# Altium PCB centralised_bms.PcbDoc
Units mm, origin at the board's own origin, x right, y up, seen from the top; angles counter-clockwise.
Board outline 152.4 x 101.6 mm, 2 copper layers (Top Layer, Bottom Layer); 15 components, 53 nets, 94 pads, 14 vias.
Unrouted connection lines stored in the file: 3.
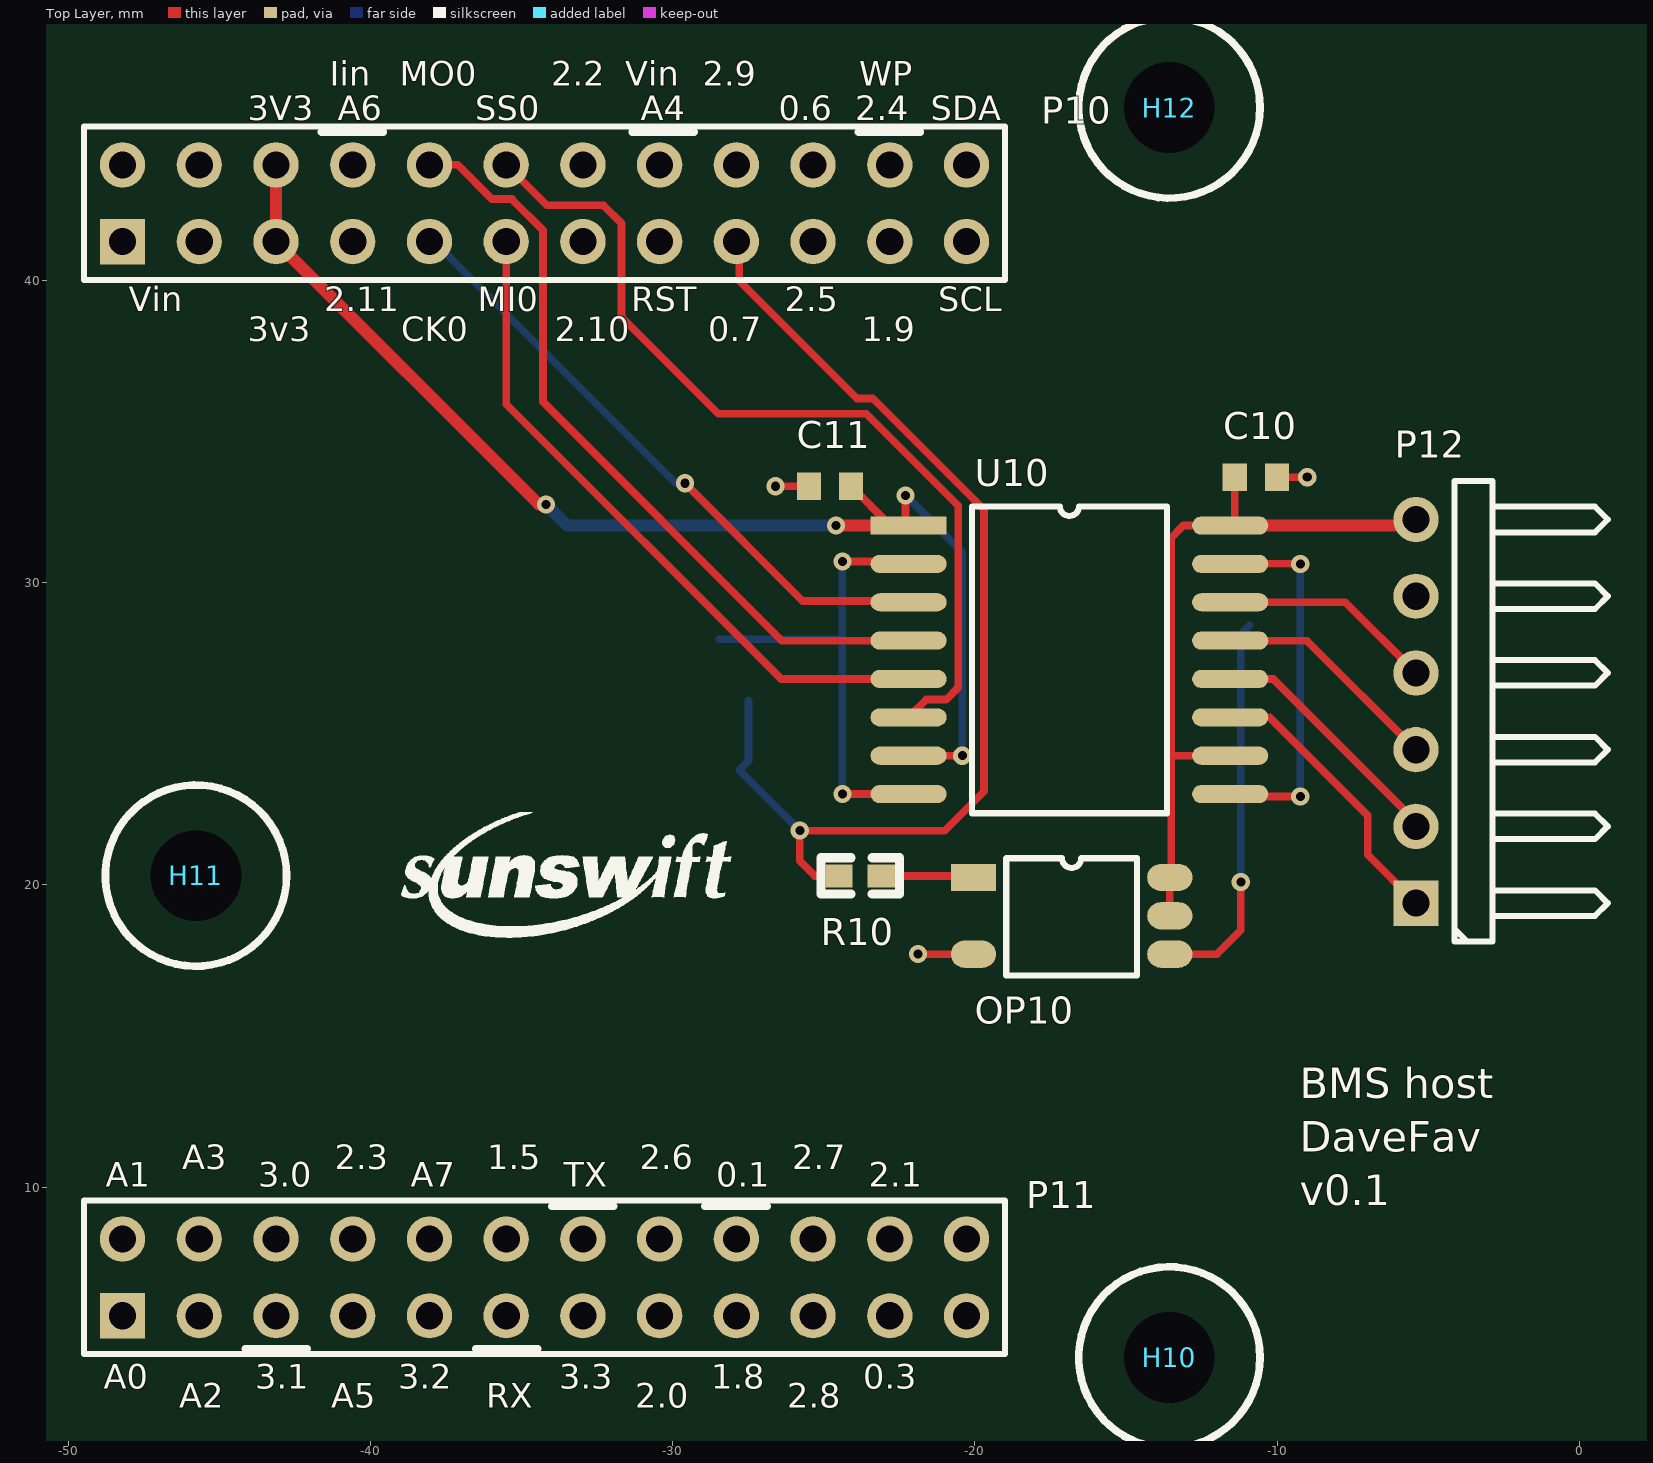
[diagram p0: Top Layer view]
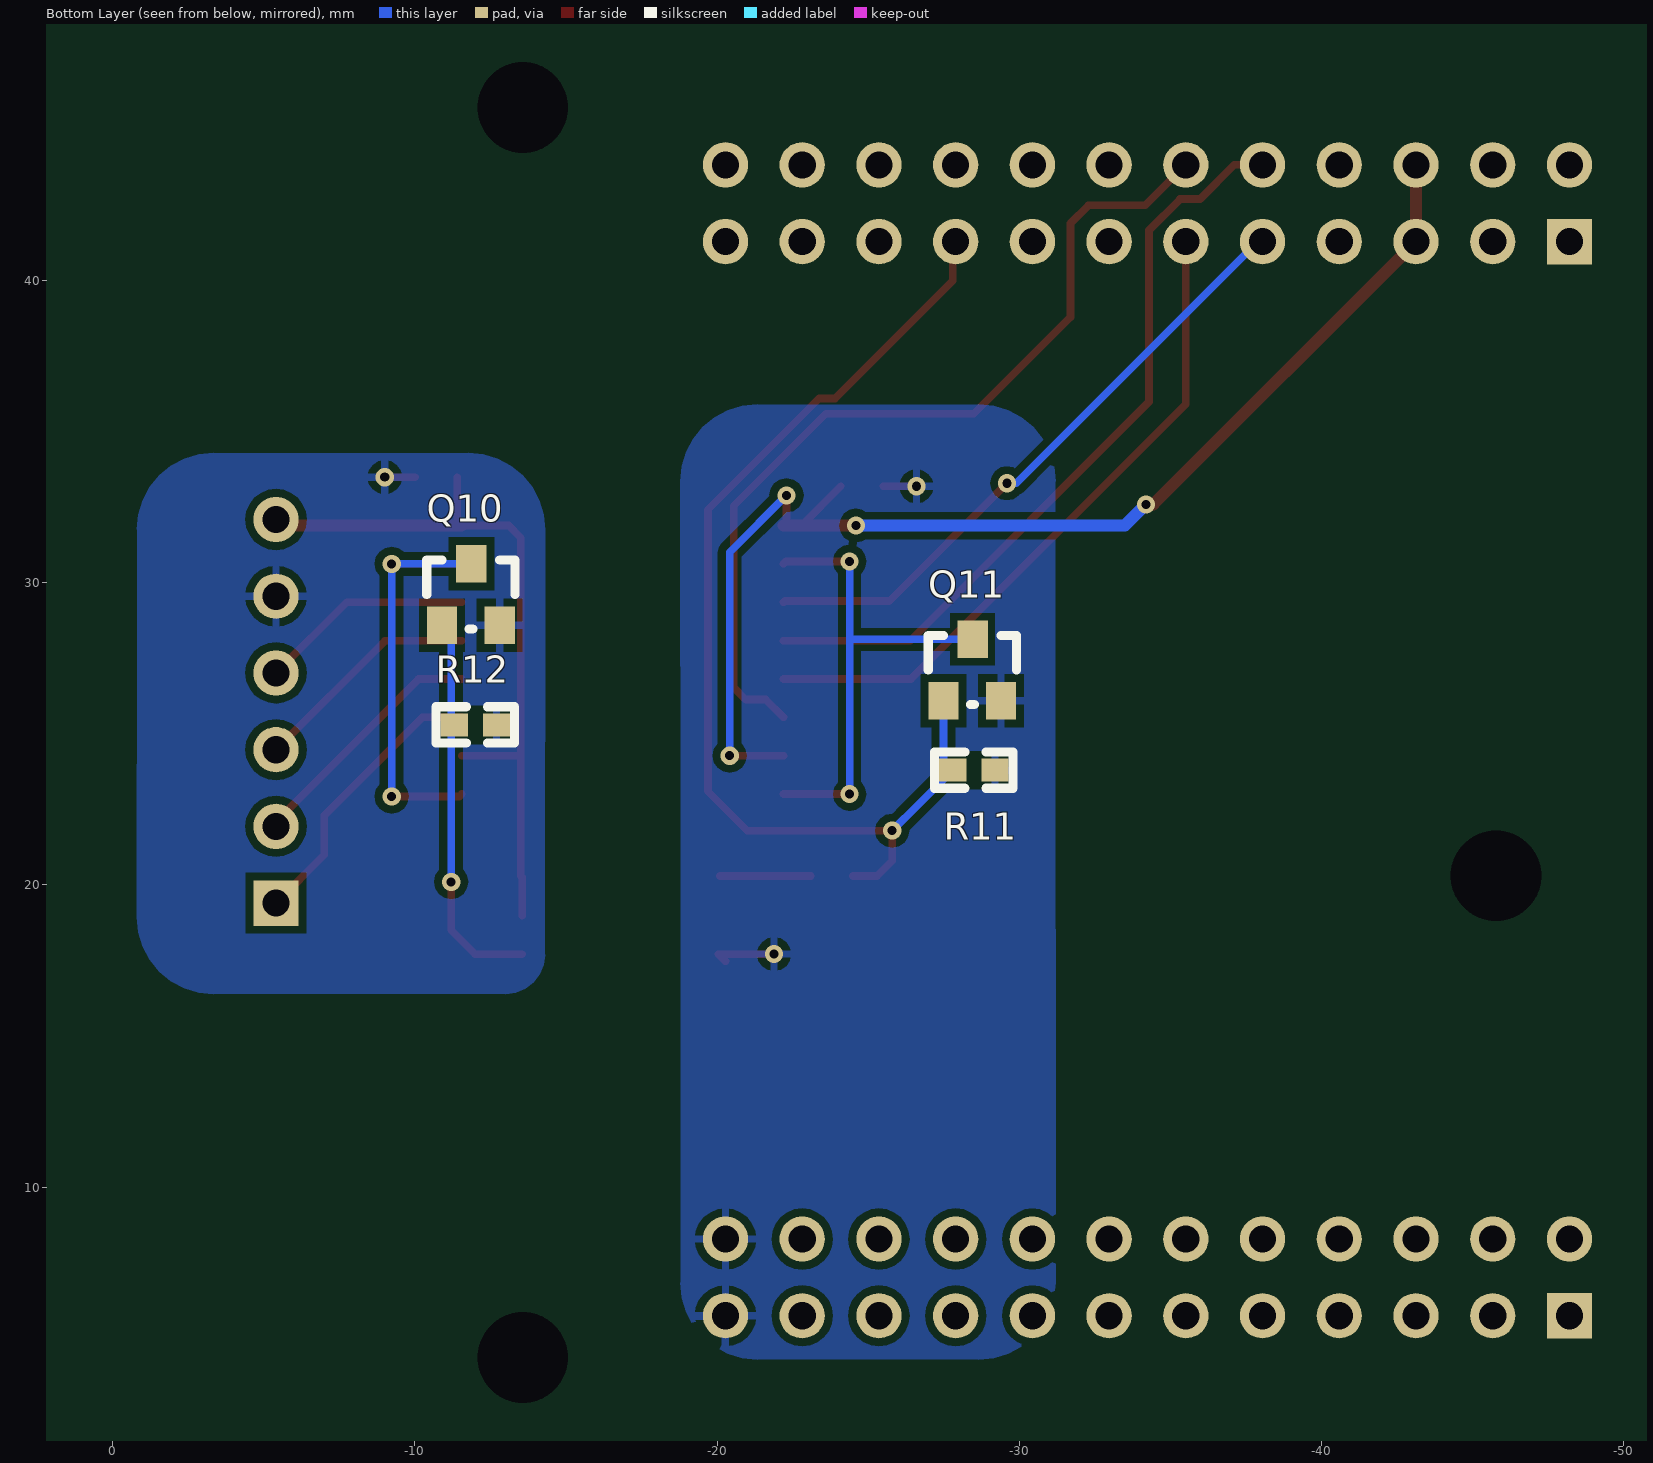
[diagram p1: Bottom Layer view, seen from below]

## Layer stack, top to bottom
Top Layer: signal copper 0.0356
Dielectric: dielectric 0.32, FR-4, Dk 4.8
Bottom Layer: signal copper 0.0356

## Board outline
-132.508,-7.888 19.892,-7.888 19.892,93.712 -132.508,93.712

## Design rules (kind name [scope] priority, off if disabled: settings)
Clearance [All] p1: gap=0.254
PolygonConnect [All] p1: connectstyle=Relief reliefconductorwidth=0.254 reliefentries=4 polygonreliefangle="90 Angle"
RoomDefinition TopLevel [InComponentClass('TopLevel')] p1: confinementstyle=ConfineIn formatcopy=TRUE lockcomponents=FALSE outline 21.092,9.012 76.192,9.012 76.192,27.312 21.092,27.312
RoutingVias [All] p1: holewidth=0.711 width=1.27 viastyle="Through Hole" minholewidth=0.3 minwidth=0.6 maxholewidth=0.711 maxwidth=1.27
SilkscreenOverComponentPads [All] p1: minsilkscreentomaskgap=0.254
SolderMaskExpansion [All] p1: expansion=0.102
Width [All] p1: maxlimit=2 minlimit=0.2 preferedwidth=0.3
27 further rules are at their usual default settings.

## Components (designator, comment, footprint, x,y, rotation, side; value= is the part's Value field where it differs from the comment)
C10 "Cap Semi" 1608[0603] -10.7,33.5 r180 top
C11 "Cap Semi" 1608[0603] -24.8,33.2 r0 top
H10 "HOLE" M2.5 -13.564,4.359 r0 top
H11 "HOLE" M2.5 -45.79,20.309 r0 top
H12 "HOLE" M2.5 -13.564,45.739 r0 top
OP10 "VOM452T" VOM452T -20.8,20.3 r0 top
P10 "Header 12X2A" HDR2X12_CEN -48.22,41.299 r0 top
P11 "Header 12X2A" HDR2X12_CEN -48.22,5.739 r0 top
P12 "Header 6H" HDR1X6H -5.4,19.4 r90 top
Q10 "ZXM61N02F" SOT23-3 -10.9,28.6 r180 bottom
Q11 "ZXM61N02F" SOT23-3 -27.5,26.1 r180 bottom
R10 "Res Semi" 0603 -23.1,20.3 r180 top
R11 "Res Semi" 0603 -29.2,23.8 r0 bottom
R12 "Res Semi" 0603 -12.7,25.3 r0 bottom
U10 "ADUM1401" SOIC_16_wide -22.2,31.9 r0 top

## Footprints (in the part's own frame and the unit in brackets; to place one, negate y for a bottom-side part, rotate by r counter-clockwise, add the part's x,y. Pads: shape width x height; smd on the part's side, far side on the other; paste and mask are expansions set on the pad)
0603 [mil]
  rect 35.43x30 smd: 1(0,0) 2(55,0)
  silkscreen extent -24,-24 79,24
1608[0603] [mm] "Chip Capacitor, Body 1.6x0.8mm, IPC High Density"
  rect 0.8x0.9 smd: 1(-0.7,0) 2(0.7,0)
  body extent -0.87,-0.48 0.87,0.48, height 1.3
HDR1X6H [mm] "Connector; Header; 6 Position; Right Angle"
  rect 1.5x1.5 hole 0.9: 1(0,0)
  round 1.5 hole 0.9: 2(2.54,0) 3(5.08,0) 4(7.62,0) 5(10.16,0) 6(12.7,0)
  silkscreen extent -1.27,-6.35 13.97,-1.27
HDR2X12_CEN [mm] "Connector; Header; 12x2 Position"
  rect 1.5x1.5 hole 0.9: 1(0,0)
  round 1.5 hole 0.9: 2(2.54,0) 3(5.08,0) 4(7.62,0) 5(10.16,0) 6(12.7,0) 7(15.24,0) 8(17.78,0) 9(20.32,0) 10(22.86,0) 11(25.4,0) 12(27.94,0) 13(0,2.54) 14(2.54,2.54) 15(5.08,2.54) 16(7.62,2.54) 17(10.16,2.54) 18(12.7,2.54) 19(15.24,2.54) 20(17.78,2.54) 21(20.32,2.54) 22(22.86,2.54) 23(25.4,2.54) 24(27.94,2.54)
  silkscreen extent -1.27,-1.27 29.21,3.81
M2.5 [mm]
  round 0 hole 3: 1(0,0)
  silkscreen extent -3,-3 3,3
SOIC_16_wide [mm]
  rect 2.52x0.6 smd: 1(0,0)
  oval 2.52x0.6 smd: 2(0,-1.27) 3(0,-2.54) 4(0,-3.81) 5(0,-5.08) 6(0,-6.35) 7(0,-7.62) 8(0,-8.89) 9(10.65,-8.89) 10(10.65,-7.62) 11(10.65,-6.35) 12(10.65,-5.08) 13(10.65,-3.81) 14(10.65,-2.54) 15(10.65,-1.27) 16(10.65,0)
  silkscreen extent 2.09,-9.53 8.55,0.64
SOT23-3 [mm]
  rect 1x1.25 smd: 1(0,0) 2(1.905,0) 3(0.965,2.032)
  silkscreen extent -0.51,-0.13 2.41,2.16
VOM452T [mm]
  rect 1.5x0.9 smd: 1(0.75,-0.05)
  oval 1.5x0.9 smd: 3(0.75,-2.59) 4(7.25,-2.59) 5(7.25,-1.32) 6(7.25,-0.05)
  silkscreen extent 1.84,-3.3 6.16,0.59

## Part data
C10 C11: "Capacitor (Semiconductor SIM Model)"
H10 H11 H12: "Hole"
P10 P11: "Header, 12-Pin, Dual row"
P12: "Header, 6-Pin, Right Angle"
Q10 Q11: "1.7A, 20V N-Channel Enhancement mode FET"
R10 R11 R12: "Semiconductor Resistor"

## Via types
v1: diameter 0.6, hole 0.3, Top Layer to Bottom Layer, 14 vias

## Nets (pads, with @x,y where several pads share a name; then routed paths per layer and width w, separated by ;. In a path a pad name is that pad's centre, name@x,y a point inside that pad or via, vN(x,y) a via of type N, cw(c..) or ccw(c..) an arc to the next point about the centre after c; other vN are vias at no path point)
3V3: C11.2 P10.3 P10.15 U10.1 U10.7 | length 41.4
  Top Layer w0.254: C11.2 U10.1@-22.8,31.9 ; v1(-22.3,32.9) -22.3,32 U10.1 ; U10.7 v1(-20.42,24.28)
  Top Layer w0.4: P10.15 P10.3 -34.441,32.6 v1(-34.2,32.6) ; v1(-24.6,31.9) -22.8,31.9 U10.1
  Bottom Layer w0.254: v1(-22.3,32.9) -20.42,31.02 v1(-20.42,24.28)
  Bottom Layer w0.4: v1(-34.2,32.6) -33.5,31.9 v1(-24.6,31.9)
EEPROM_WP: P10.23
GND: C11.1 OP10.3 P10.13 P10.14 P11.12 P11.24 Q11.2 R11.1 | length 3.3
  Top Layer w0.254: v1(-26.6,33.2) C11.1 ; v1(-21.89,17.71) OP10.3 OP10.3@-20.28,17.48
ISOGND: C10.1 P12.5 Q10.2 R12.1 | length 1
  Top Layer w0.254: C10.1 v1(-9,33.5)
NetOP10_1: OP10.1 R10.1 | length 3
  Top Layer w0.254: R10.1 OP10.1@-20.1,20.3
NetOP10_4: OP10.4 Q10.1 R12.2 | length 12.9
  Top Layer w0.254: OP10.4 -11.99,17.71 -11.2,18.5 v1(-11.2,20.1)
  Bottom Layer w0.254: v1(-11.2,20.1) -11.2,25.3 -11.2,28.3 Q10.1
NetP12_1: P12.1 U10.11 | length 9.5
  Top Layer w0.254: U10.11 -10.25,25.55 -7,22.3 -7,21 P12.1
NetP12_2: P12.2 U10.12 | length 8.3
  Top Layer w0.254: U10.12 -10.12,26.82 -5.4,22.1 P12.2
NetP12_3: P12.3 U10.13 | length 7.6
  Top Layer w0.254: U10.13 -9.01,28.09 P12.3
NetP12_4: P12.4 U10.14 | length 7.1
  Top Layer w0.254: U10.14 -7.74,29.36 P12.4
NetQ10_3: Q10.3 U10.9 U10.15 | length 15
  Top Layer w0.254: U10.9 -11.47,22.93 v1(-9.23,22.93) ; U10.15 v1(-9.23,30.63)
  Bottom Layer w0.254: Q10.3 -9.232,30.632 v1(-9.23,30.63) v1(-9.23,22.93)
NetQ11_3: Q11.3 U10.2 U10.8 | length 16.2
  Top Layer w0.254: v1(-24.39,23.01) U10.8 ; v1(-24.39,30.71) -22.28,30.71 U10.2
  Bottom Layer w0.254: Q11.3 -24.422,28.132 ; v1(-24.39,23.01) v1(-24.39,30.71)
"PIO 0.1/CLKOUT": P11.21
"PIO 0.2/SSEL0": P10.18 U10.6 | length 29.5
  Top Layer w0.254: P10.18 -34.181,42.5 -32.3,42.5 -31.7,41.9 -31.7,38.8 -28.5,35.6 -23.6,35.6 -20.559,32.559 -20.559,26.538 -20.958,26.139 -21.611,26.139 U10.6
"PIO 0.3": P11.11
"PIO 0.4/SCL": P10.12
"PIO 0.5/SDA": P10.24
"PIO 0.6": P10.22
"PIO 0.7": P10.9 Q11.1 R10.2 R11.2 | length 36.9
  Top Layer w0.254: P10.9 -27.8,41.199 -27.8,40 -23.908,36.108 -23.39,36.108 -19.7,32.418 -19.7,23.1 -21,21.8 v1(-25.8,21.8) -25.8,20.8 -25.3,20.3 R10.2
  Bottom Layer w0.254: Q11.1 -27.5,24.103 R11.2 -25.803,21.8 v1(-25.8,21.8) -26.203,22.203
"PIO 0.8/MISO0": P10.6 U10.5 | length 22.5
  Top Layer w0.254: P10.6 -35.52,35.92 -26.42,26.82 U10.5
"PIO 0.9/MOSI0": P10.17 U10.4 | length 25.7
  Top Layer w0.254: P10.17 -37.119,43.839 -35.988,42.708 -35.33,42.708 -34.3,41.679 -34.3,36 -26.39,28.09 U10.4
"PIO 0.10/SCK0": P10.5 U10.3 | length 20.8
  Top Layer w0.254: v1(-29.6,33.3) -25.7,29.4 -22.24,29.4 U10.3
  Bottom Layer w0.254: P10.5 -37.899,41.299 -29.9,33.3 v1(-29.6,33.3)
"PIO 0.11/ADC0": P11.1
"PIO 1.0/ADC1": P11.13
"PIO 1.1/ADC2": P11.2
"PIO 1.2/ADC3": P11.14
"PIO 1.3/ADC4": P10.20
"PIO 1.4/ADC5/WAKEUP": P11.4
"PIO 1.5": P11.18
"PIO 1.6/RX": P11.6
"PIO 1.7/TX": P11.19
"PIO 1.8": P11.9
"PIO 1.9": P10.11
"PIO 1.10/ADC6": P10.16
"PIO 1.11/ADC7": P11.17
"PIO 2.0/SSEL1": P11.8
"PIO 2.1/SCK1": P11.23
"PIO 2.2/MISO1": P10.19
"PIO 2.3/MOSI1": P11.16
"PIO 2.5": P10.10
"PIO 2.6": P11.20
"PIO 2.7": P11.22
"PIO 2.8": P11.10
"PIO 2.9": P10.21
"PIO 2.10": P10.7
"PIO 2.11": P10.4
"PIO 3.0": P11.15
"PIO 3.1": P11.3
"PIO 3.2": P11.5
"PIO 3.3": P11.7
R\E\S\E\T\: P10.8
VIN: P10.1 P10.2
VREG: C10.2 OP10.5 OP10.6 P12.6 U10.10 U10.16 | length 24.5
  Top Layer w0.254: OP10.5 OP10.6 -13.5,20.3 -13.5,24.2 ; U10.10 -13.42,24.28 ccw(c-13.42,24.2) -13.5,24.2 ; C10.2 -11.4,32.05 U10.16 -13.1,31.9 -13.5,31.5 -13.5,24.2 ; -9.1,31.9 -9.063,31.9
  Top Layer w0.4: U10.16 -9.1,31.9 ; -9.063,31.9 P12.6@-5.4,31.9
pads on no net: H10.1 H11.1 H12.1

## Polygon pours and split planes (outlines as drawn)
GND on Bottom Layer "GND_PLANE" (solid, pour order 4): -28,4.3 -23.2,4.3 -22.3,4.3 -21.34,4.3 ccw(c-21.34,6.84) -18.8,6.84 -18.8,21.1 -18.8,33.36 ccw(c-21.34,33.36) -21.34,35.9 -21.9,35.9 -28.66,35.9 ccw(c-28.66,33.36) -31.2,33.36 -31.2,28 -31.2,6.84 ccw(c-28.66,6.84) -28.66,4.3 -27.7,4.3
ISOGND on Bottom Layer "ISOGND_PLANE" (solid, pour order 8): -4.5,16.4 -10.6,16.4 -13,16.4 cw(c-13,17.7) -14.3,17.7 -14.3,31.76 cw(c-11.76,31.76) -11.76,34.3 -8.4,34.3 -3.34,34.3 cw(c-3.34,31.76) -0.8,31.76 -0.8,29.1 -0.8,18.94 cw(c-3.34,18.94) -3.34,16.4 -4.5,16.4

## Silkscreen, mask and mechanical layers (free items; w line width, h text height)
Top Overlay:
  drawing of 1666 lines, arcs and shapes, not listed
  text "Iin" at -41.357,46.46 h0.81
  text "MO0" at -39.051,46.46 h0.81
  text "2.2" at -34.028,46.46 h0.81
  text "Vin" at -31.578,46.46 h0.81
  text "2.9" at -29.004,46.46 h0.81
  text "WP" at -23.831,46.46 h0.81
  text "3V3" at -44.075,45.317 h0.81
  text "A6" at -41.103,45.317 h0.81
  text "SS0" at -36.539,45.317 h0.81
  text "A4" at -31.07,45.317 h0.81
  text "0.6" at -26.492,45.317 h0.81
  text "2.4" at -23.958,45.317 h0.81
  text "SDA" at -21.469,45.317 h0.81
  text "Vin" at -48.012,38.992 h0.81
  text "2.11" at -41.539,38.992 h0.81
  text "MI0" at -36.458,38.992 h0.81
  text "RST" at -31.377,38.992 h0.81
  text "2.5" at -26.296,38.992 h0.81
  text "SCL" at -21.215,38.992 h0.81
  text "3v3" at -44.08,37.993 h0.81
  text "CK0" at -38.999,37.993 h0.81
  text "2.10" at -33.918,37.993 h0.81
  text "0.7" at -28.836,37.993 h0.81
  text "1.9" at -23.755,37.993 h0.81
  text "BMS host" at -9.251,12.946 h1
  text "DaveFav" at -9.251,11.168 h1
  text "A3" at -46.245,10.584 h0.81
  text "2.3" at -41.196,10.584 h0.81
  text "1.5" at -36.147,10.584 h0.81
  text "2.6" at -31.097,10.584 h0.81
  text "2.7" at -26.048,10.584 h0.81
  text "A1" at -48.77,10.005 h0.81
  text "3.0" at -43.721,10.005 h0.81
  text "A7" at -38.671,10.005 h0.81
  text "TX" at -33.622,10.005 h0.81
  text "0.1" at -28.572,10.005 h0.81
  text "2.1" at -23.523,10.005 h0.81
  text "v0.1" at -9.251,9.39 h1
  text "A0" at -48.85,3.322 h0.81
  text "3.1" at -43.821,3.322 h0.81
  text "3.2" at -39.092,3.322 h0.81
  text "3.3" at -33.762,3.322 h0.81
  text "1.8" at -28.733,3.322 h0.81
  text "0.3" at -23.704,3.322 h0.81
  text "A2" at -46.335,2.687 h0.81
  text "A5" at -41.306,2.687 h0.81
  text "RX" at -36.177,2.687 h0.81
  text "2.0" at -31.248,2.687 h0.81
  text "2.8" at -26.219,2.687 h0.81
Mechanical 1:
  lines w0.2: -22.8,47.899 -50,47.899 -50,2.099 -22.5,2.099 cw(c-19.811,0.16) -16.5,0.005 ; -22.799,47.9 ccw(c-20.11,49.839) -16.799,49.994 ; -16.805,49.999 0,49.999 0,0 -16.505,0